# Altium PCB RF-2530.PcbDoc
Units mm, origin at the board's own origin, x right, y up, seen from the top; angles counter-clockwise.
Board outline 32 x 51.63 mm, 2 copper layers (Top Layer, Bottom Layer); 37 components, 37 nets, 135 pads, 49 vias.
Unrouted connection lines stored in the file: 4.
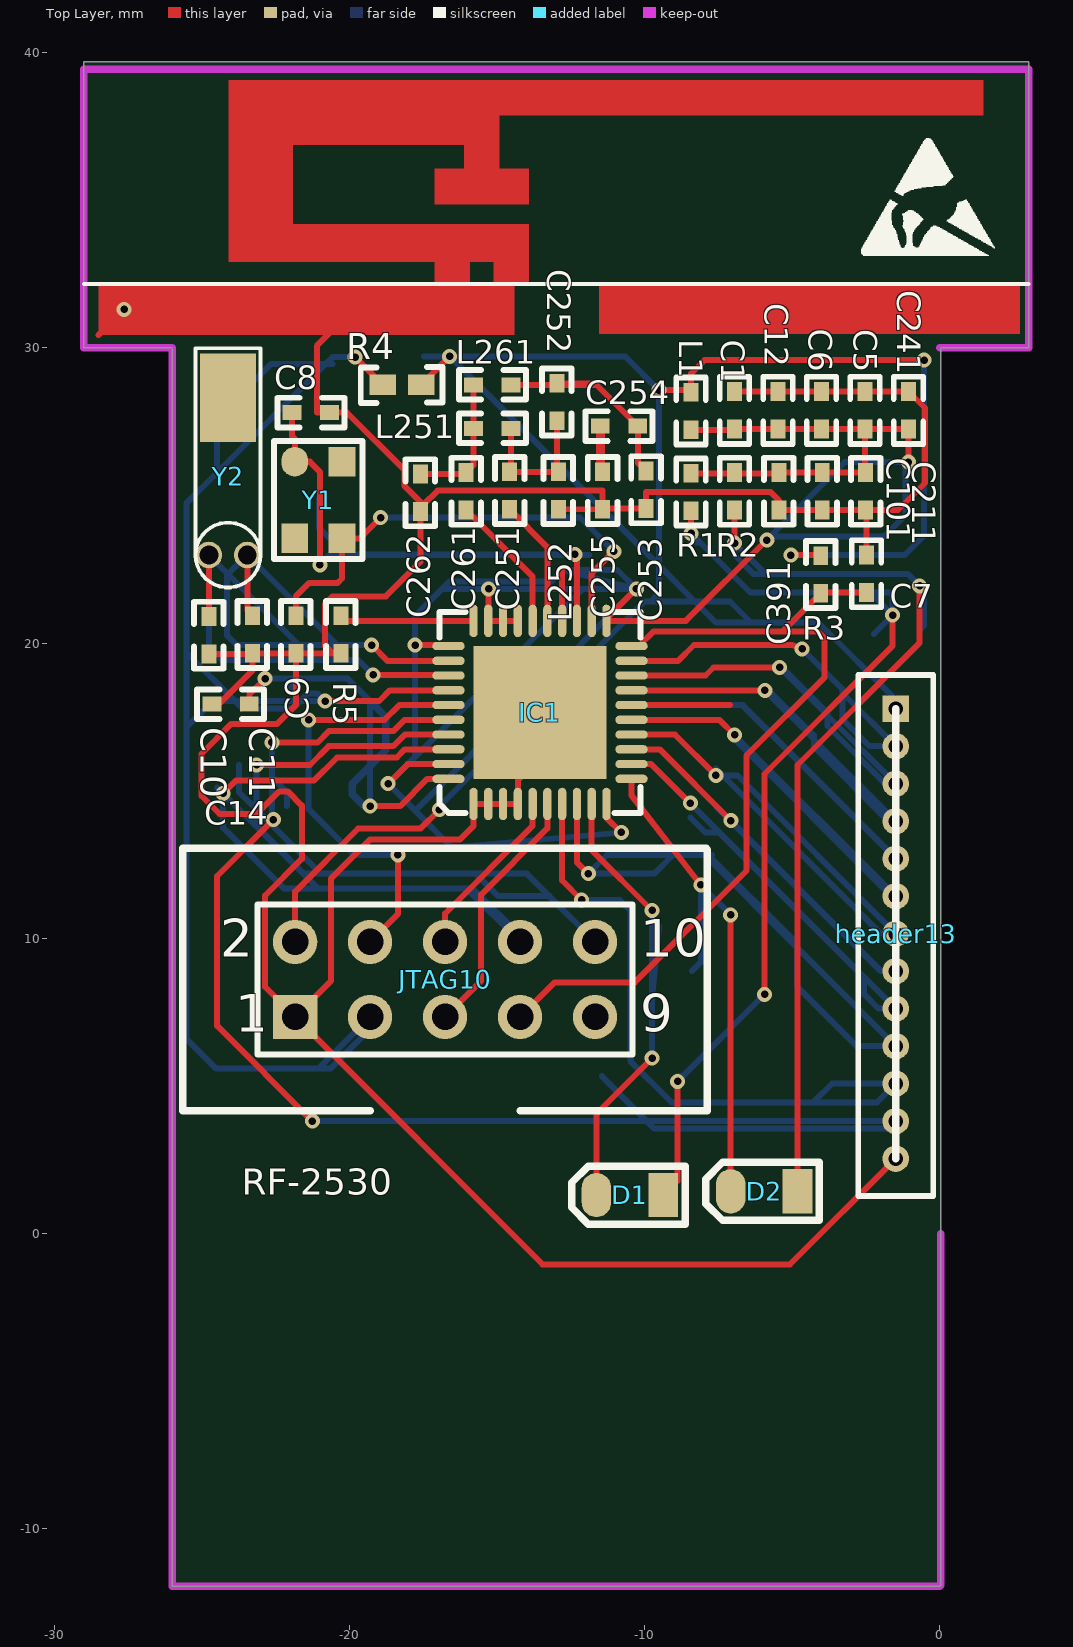
[diagram p0: Top Layer view]
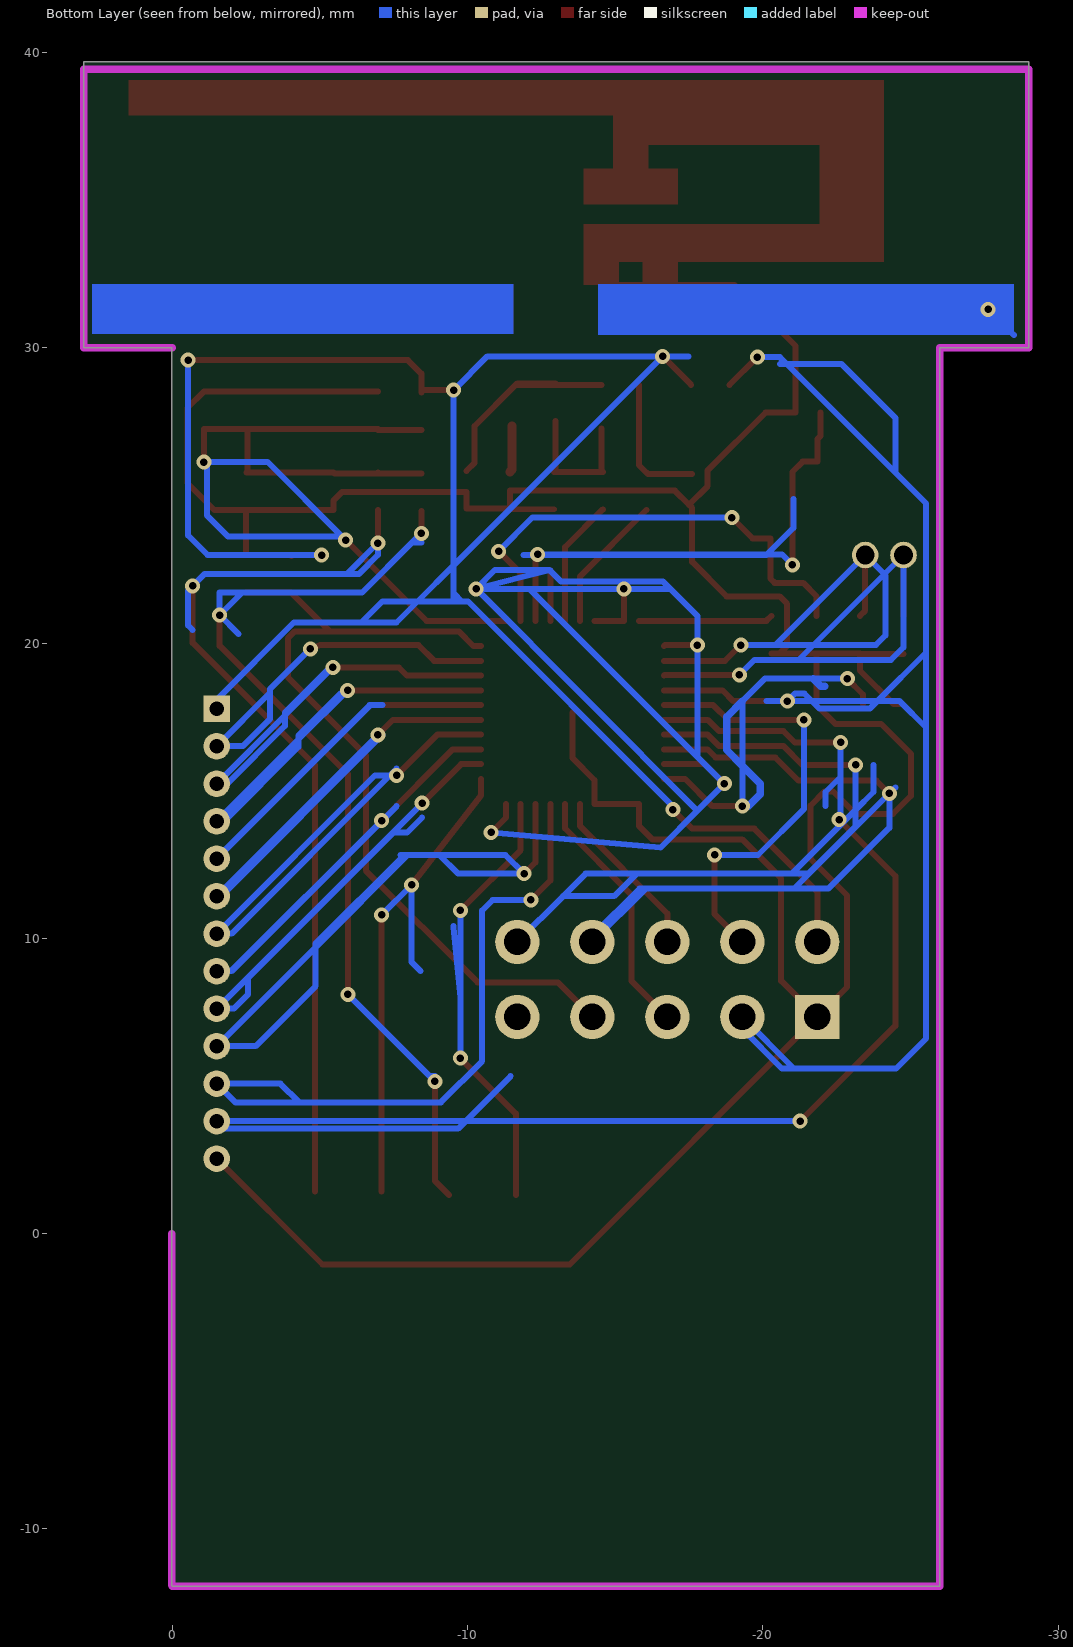
[diagram p1: Bottom Layer view, seen from below]

## Layer stack, top to bottom
Top Layer: signal copper 0.0356
Dielectric: dielectric 0.32, FR-4, Dk 4.8
Bottom Layer: signal copper 0.0356

## Board outline
-29,30 -29,39.692 3,39.692 3,30 0.025,30 0.025,-11.916 0,-11.941 -26,-11.941 -26,30

## Design rules (kind name [scope] priority, off if disabled: settings)
Clearance Clearance_2 [All] p1 off: gap=0.254
Clearance Clearance_1 [All] p2 off: gap=0.4
Clearance [All] p3: gap=0.152
FabricationTestPointUsage TestPointUsage [All] p1: valid=0 allowmultiple=FALSE
FabricationTestpoint Testpoint [All] p1: side=3 testpointundercomponent=TRUE minsize=1.016 maxsize=2.54 preferedsize=1.524 minholesize=0 maxholesize=1.016 preferedholesize=0.813 testpointgrid=0.025 allowsidetop=TRUE allowsidebottom=TRUE usegrid=TRUE gridtolerance=0
PolygonConnect [All] p1: connectstyle=Direct reliefconductorwidth=0.254 reliefentries=4 polygonreliefangle="90 Angle" airgapwidth=0.254
RoutingVias [All] p1: holewidth=0.254 width=0.508 viastyle="Through Hole" minholewidth=0.203 minwidth=0.508 maxholewidth=0.711 maxwidth=1.27
SolderMaskExpansion [All] p1: expansion=0.102
Width [All] p1: maxlimit=2.032 minlimit=0.2 preferedwidth=0.203
26 further rules are at their usual default settings.

## Components (designator, comment, footprint, x,y, rotation, side; value= is the part's Value field where it differs from the comment)
C1 "2.2u" 0402 -6.96,27.254 r90 top
C5 "0.1" 0402 -2.54,27.254 r90 top
C6 "220p" 0402 -4.013,27.254 r90 top
C7 "0.1" 0402 -2.489,21.717 r90 top
C8 "27pF" 0402 -21.946,27.813 r0 top
C9 "27pF" 0402 -21.819,20.93 r270 top
C10 "15pF" 0402 -24.765,20.904 r270 top
C11 "15pF" 0402 -23.292,20.93 r270 top
C12 "0.1" 0402 -5.486,27.254 r90 top
C14 "1uF" 0402 -23.393,17.932 r180 top
C101 "0.1" 0402 -3.988,25.781 r270 top
C211 "0.1" 0402 -2.515,25.781 r270 top
C241 "0.1" 0402 -1.067,27.254 r90 top
C251 "18p" 0402 -14.58,24.536 r90 top
C252 "1p" 0402 -12.979,27.534 r90 top
C253 "" 0402 -9.957,25.832 r270 top
C254 "2.2p" 0402 -10.236,27.356 r180 top
C255 "" 0402 -11.43,24.536 r90 top
C261 "18p" 0402 -16.053,24.511 r90 top
C262 "1p" 0402 -17.602,25.73 r270 top
C391 "1u" 0402 -5.461,25.781 r270 top
D1 "LED" LED-0603 -8.636,2.235 r180 top
D2 "LED" LED-0603 -4.089,2.362 r180 top
header13 "header13" header13 -1.499,17.78 r270 top
IC1 "CC2530" PVQFN-N40 -15.799,14.554 r90 top locked
JTAG10 "DUBUGGER" JTAG -21.844,7.341 r0 top
L1 "2nH" 0402 -8.433,27.229 r90 top
L251 "" 0402 -15.799,27.28 r0 top
L252 "2nH" 0402 -12.929,25.806 r270 top
L261 "2nH" 0402 -15.799,28.753 r0 top
R1 "330R" 0402 -8.433,24.486 r90 top
R2 "330R" 0402 -6.96,24.511 r90 top
R3 "10K" 0402 -4.039,21.692 r90 top
R4 "10K" rea0402 -18.872,28.753 r0 top
R5 "56K" 0402 -20.295,20.93 r270 top
Y1 "32M" XT-SMD3225 -22.555,26.848 r270 top
Y2 "32.768K" XT_3 -24.765,22.987 r0 top

## Footprints (in the part's own frame and the unit in brackets; to place one, negate y for a bottom-side part, rotate by r counter-clockwise, add the part's x,y. Pads: shape width x height; smd on the part's side, far side on the other; paste and mask are expansions set on the pad)
0402 [mil]
  rect 25x20 smd: 1(0,0) 2(50,0)
  silkscreen extent -20,-20 70,20
header13 [mm]
  rect 0.9x0.9 hole 0.5: 1(0,0)
  round 0.9 hole 0.5: 2(1.27,0) 3(2.54,0) 4(3.81,0) 5(5.08,0) 6(6.35,0) 7(7.62,0) 8(8.89,0) 9(10.16,0) 10(11.43,0) 11(12.7,0) 12(13.97,0) 13(15.24,0)
  silkscreen extent -1.14,-1.27 16.51,1.27
JTAG [mm]
  rect 1.5x1.5 hole 0.9: 1(0,0)
  round 1.5 hole 0.9: 2(0,2.54) 3(2.54,0) 4(2.54,2.54) 5(5.08,0) 6(5.08,2.54) 7(7.62,0) 8(7.62,2.54) 9(10.16,0) 10(10.16,2.54)
  silkscreen extent -3.81,-3.18 13.96,5.71
LED-0603 [mm]
  rect 1x1.5 smd: A(0.737,0.93)
  oval 1x1.5 smd: K(3,0.93)
  silkscreen extent 0,-0.05 3.84,1.91
PVQFN-N40 [mm]
  oval 1.1x0.28 smd: 1(0,0) 2(0,-0.5) 3(0,-1) 4(0,-1.5) 5(0,-2) 6(0,-2.5) 7(0,-3) 8(0,-3.5) 9(0,-4) 10(0,-4.5) 21(6.2,-4.5) 22(6.2,-4) 23(6.2,-3.5) 24(6.2,-3) 25(6.2,-2.5) 26(6.2,-2) 27(6.2,-1.5) 28(6.2,-1) 29(6.2,-0.5) 30(6.2,0)
  oval 0.28x1.1 smd: 11(0.85,-5.35) 12(1.35,-5.35) 13(1.85,-5.35) 14(2.35,-5.35) 15(2.85,-5.35) 16(3.35,-5.35) 17(3.85,-5.35) 18(4.35,-5.35) 19(4.85,-5.35) 20(5.35,-5.35) 31(5.35,0.85) 32(4.85,0.85) 33(4.35,0.85) 34(3.85,0.85) 35(3.35,0.85) 36(2.85,0.85) 37(2.35,0.85) 38(1.85,0.85) 39(1.35,0.85) 40(0.85,0.85)
  rect 4.5x4.5 smd: 41(3.1,-2.25)
  silkscreen extent -0.3,-5.65 6.5,1.15
rea0402 [mm]
  rect 0.9x0.7 smd: 1(0,0) 2(1.3,0)
  silkscreen extent -0.75,-0.61 2.02,0.6
XT-SMD3225 [mm]
  oval 1x0.9 smd: 1(0.7,0.7)
  rect 1x0.9 smd: 2(3.3,2.3) 3(3.3,0.7) 4(0.7,2.3)
  silkscreen extent 0,0 4,3
XT_3 [mm]
  round 0.9 hole 0.635: 1(1.3,0) 2(0,0)
  rect 1.9x3 smd: ""(0.65,5.325)
  silkscreen extent -0.45,-1.1 1.75,7

## Part data
C1 C5 C6 C7 C8 C9 C10 C11 C12 C14 C101 C211 C241 C251 C252 C253 C254 C255 C261 C262 C391: library part CAP, "Capacitor"
IC1: library part CC2430
JTAG10: library part JTAG10
L1 L251 L252 L261: library part INDUCTOR
R1 R2 R3 R4 R5: library part RES2
Y1: library part CRY
Y2: library part CRYSTAL, "Crystal"

## Via types
v1: diameter 0.508, hole 0.254, Top Layer to Bottom Layer, 49 vias

## Nets (pads, with @x,y where several pads share a name; then routed paths per layer and width w, separated by ;. In a path a pad name is that pad's centre, name@x,y a point inside that pad or via, vN(x,y) a via of type N, cw(c..) or ccw(c..) an arc to the next point about the centre after c; other vN are vias at no path point)
1VCC1.8: C14.1 IC1.40 | length 16.7
  Top Layer w0.203: C14.1 -23.393,18.263 v1(-22.86,18.796) ; v1(-19.304,14.478) -18.288,14.478 -17.362,15.404 IC1.40
  Bottom Layer w0.203: v1(-22.86,18.796) -21.702,18.796 -20.066,18.796 -19.304,18.034 -19.304,15.85 v1(-19.304,14.478)
  Bottom Layer w0.254: -22.098,18.542 -21.956,18.542 -21.702,18.796 ; v1(-19.304,14.478) -19.507,14.478 -19.914,14.884 -19.914,15.24 -19.304,15.85 -18.771,16.383 -18.771,17.501 -19.304,18.034
CSN: IC1.6 JTAG10.5 | length 8.6
  Top Layer w0.203: JTAG10.5 -15.545,8.56 -15.545,11.481 -13.299,13.727 IC1.6
DC: IC1.34 JTAG10.3 R4.1 | length 72.8
  Top Layer w0.203: v1(-20.828,18.034) -19.003,18.034 -18.633,18.404 IC1.34 ; v1(-19.812,29.693) R4.1
  Bottom Layer w0.203: -20.574,29.464 -20.803,29.464 ; -20.117,18.034 v1(-20.828,18.034) ; v1(-19.812,29.693) -20.574,29.693 -20.803,29.464 ; -25.527,6.604 -24.511,5.588 -21.057,5.588 ; -25.527,6.604 -25.527,17.143 ; -25.527,6.604 -25.527,19.685 ; -25.527,17.143 -24.636,18.034 -23.876,18.034 ; -25.527,17.143 -25.527,19.685 ; -25.527,19.685 -23.876,18.034 ; -25.527,19.685 -25.527,24.74 -24.486,25.781 ; -24.486,25.781 -24.486,27.635 -22.657,29.464 -20.803,29.464 ; -24.486,25.781 -20.803,29.464 ; -23.876,18.034 -23.622,17.78 -21.92,17.78 -21.666,18.034 ; -23.876,18.034 -21.666,18.034 ; -21.666,18.034 -21.412,18.288 -21.082,18.288 v1(-20.828,18.034) ; -21.666,18.034 v1(-20.828,18.034) ; -21.057,5.588 JTAG10.3 -19.304,6.934 -20.65,5.588 -21.057,5.588
DD: IC1.35 JTAG10.4 | length 15
  Top Layer w0.203: v1(-21.387,17.399) -18.821,17.399 -18.316,17.904 IC1.35 ; JTAG10.4 -18.364,10.82 v1(-18.364,12.827)
  Bottom Layer w0.203: v1(-21.387,17.399) -21.387,14.376 -19.837,12.827 v1(-18.364,12.827)
GND: C1.2 C5.2 C6.2 C7.2 C8.2 C9.2 C10.2 C11.2 C12.2 C14.2 C101.2 C211.2 C241.2 C253.2 C255.1 C262.2 C391.2 header13.13 IC1.1 IC1.2 IC1.3 IC1.4 IC1.41 JTAG10.1 L252.2 R5.2 | length 123.8
  Top Layer w0.2: C10.2 -23.317,19.634 C11.2 ; L252.2 C255.1 ; C1.2 C12.2 C6.2 C5.2 C241.2 ; C391.2 C101.2 C211.2 -2.489,24.486 C7.2
  Top Layer w0.203: -28.508,30.437 v1(-27.633,31.312) ; C14.2 -24.432,17.932 -23.292,19.072 C11.2 C9.2 ; R5.2 -20.575,19.66 ; -15.119,32.141 -19.035,32.141 -21.105,30.071 -21.105,27.813 C8.2 -20.092,27.813 -18.133,25.854 -18.133,25.321 C262.2@-17.498,24.686 ; IC1.41 -13.549,16.114 -14.299,15.364 IC1.4 IC1.3 IC1.2 IC1.1 -15.799,13.815 -16.256,13.357 -19.302,13.357 -20.623,12.037 -20.623,8.562 JTAG10.1 ; C391.2 -5.461,24.84 -5.738,25.118 -9.957,25.118 C253.2 -11.405,24.562 C255.1 -11.43,25.168 -17.016,25.168 C262.2@-17.498,24.686 ; C211.2 -1.422,24.511 -0.508,25.425 -0.508,27.965 C241.2 ; header13.13 -5.083,-1.044 -13.459,-1.044 JTAG10.1 ; JTAG10.1 -22.858,8.354 -22.858,11.452 -21.613,12.697 -21.613,14.5 -22.096,14.983 -22.375,14.983 -23.137,14.221 -24.407,14.221 -25.017,14.831 -25.017,16.253 -24.001,17.269 -22.454,17.269 -21.819,17.904 C9.2 ; C9.2 -20.575,19.66 ; -20.575,19.66 -20.826,19.911 -20.826,21.333 -20.572,21.587 -18.771,21.587 -17.602,22.755 C262.2 -17.602,24.582 C262.2@-17.498,24.686
  Bottom Layer w0.203: -28.508,30.437 v1(-27.633,31.312)
LED1: D2.K IC1.11 | length 18.2
  Top Layer w0.203: IC1.11 -10.449,14.843 v1(-8.103,11.811) ; D2.K v1(-7.089,10.798)
  Bottom Layer w0.203: -8.407,8.89 -8.103,9.195 v1(-8.103,11.811) v1(-7.089,10.798)
LED2: D1.K IC1.9 | length 17.3
  Top Layer w0.203: IC1.9 -11.799,12.993 v1(-9.754,10.947) ; D1.K -11.636,4.061 v1(-9.754,5.944)
  Bottom Layer w0.203: v1(-9.754,5.944) -9.754,8.001 ; v1(-9.754,10.947) -9.754,8.001 ; -9.525,10.414 -9.525,10.363 -9.754,8.001
MISO: IC1.37 JTAG10.10 | length 29.7
  Top Layer w0.203: v1(-23.146,15.875) -21.341,15.875 -20.706,16.51 -18.522,16.51 -18.128,16.904 IC1.37
  Bottom Layer w0.203: -23.749,15.875 -23.749,14.961 -23.146,14.358 ; v1(-23.146,15.875) -23.146,14.358 ; JTAG10.10 -13.233,11.43 ; -23.146,14.358 -20.98,12.192 ; -23.146,14.358 -23.146,13.794 -21.544,12.192 -20.98,12.192 ; -20.98,12.192 -15.723,12.192 ; -15.723,12.192 -14.961,11.43 -13.233,11.43 ; -15.723,12.192 -13.995,12.192 -13.233,11.43
MOSI: IC1.38 JTAG10.8 | length 28.6
  Top Layer w0.203: v1(-24.282,14.91) -23.851,15.342 -21.209,15.342 -20.422,16.129 -18.4,16.129 -18.125,16.404 IC1.38
  Bottom Layer w0.203: -24.486,15.113 v1(-24.282,14.91) ; v1(-24.282,14.91) -24.282,13.749 -22.218,11.684 -21.057,11.684 ; v1(-24.282,14.91) -21.057,11.684 ; -21.057,11.684 -16.027,11.684 ; -16.027,11.684 JTAG10.8 -14.224,10.084 -15.824,11.684 -16.027,11.684
NetC1_1: C1.1 C5.1 C6.1 C12.1 C101.1 C211.1 C241.1 C391.1 IC1.10 IC1.21 IC1.24 IC1.27 IC1.28 IC1.29 IC1.31 IC1.39 L1.1 R1.2 R2.2 | length 99.5
  Top Layer w0.203: v1(-18.694,15.24) -18.03,15.904 IC1.39 ; v1(-17.78,19.939) -16.684,19.939 IC1.31 ; v1(-15.291,21.844) -15.291,20.762 IC1.29 IC1.28 IC1.27 ; IC1.24 -12.799,22.456 ; IC1.10 -11.299,14.093 v1(-10.795,13.589) ; v1(-10.287,21.844) -11.299,20.832 IC1.21 -8.608,20.754 v1(-5.867,23.495) ; R1.2 -6.985,25.756 R2.2 -6.934,25.756 -5.486,25.756 C391.1 C101.1 C211.1 -2.54,25.806 C5.1 ; L1.1 -6.96,27.229 C1.1 C12.1 C6.1 C5.1 ; v1(-1.067,26.137) C241.1 C5.1
  Bottom Layer w0.203: v1(-10.795,13.589) -16.535,13.081 -17.78,14.326 ; v1(-5.867,23.495) v1@-5.74,23.622 ; v1@-1.168,26.035 -1.168,24.333 -1.88,23.622 v1@-5.74,23.622 ; v1(-1.067,26.137) -3.226,26.137 v1@-5.74,23.622 ; -17.78,14.326 v1(-10.287,21.844) ; -17.78,14.326 v1(-18.694,15.24) -17.78,16.154 ; -17.78,16.154 -12.09,21.844 ; -17.78,16.154 v1(-17.78,19.939) -17.78,20.93 -16.866,21.844 ; -16.866,21.844 -16.612,22.098 ; -16.866,21.844 v1(-15.291,21.844) -12.09,21.844 ; -16.612,22.098 -13.157,22.098 ; -16.612,22.098 -15.291,22.098 -13.157,22.098 ; -13.157,22.098 -12.799,22.456 -12.776,22.479 ; -12.776,22.479 v1(-10.287,21.844) ; -12.776,22.479 -10.922,22.479 v1(-10.287,21.844) ; -12.09,21.844 v1(-10.287,21.844)
NetC8_1: C8.1 IC1.23 Y1.1 | length 27.4
  Top Layer w0.203: C8.1 -21.946,27.011 -21.855,26.921 Y1.1 -21.348,26.148 -21.004,25.803 v1(-21.004,22.654) ; v1(-12.368,23.009) -12.299,22.941 IC1.23
  Bottom Layer w0.203: -21.031,24.892 -21.031,23.901 -20.139,23.009 ; v1(-21.004,22.654) -20.648,23.009 -20.139,23.009 ; v1(-12.368,23.009) -20.139,23.009 ; -11.887,22.987 -20.117,22.987 -20.139,23.009
NetC9_1: C9.1 IC1.22 Y1.2 | length 16.5
  Top Layer w0.203: C9.1 -21.819,21.59 -21.364,22.045 -20.402,22.045 -20.255,22.192 Y1.2 -19.658,23.548 v1(-18.948,24.257) ; IC1.22 -11.799,22.364 v1(-11.049,23.114)
  Bottom Layer w0.203: v1(-18.948,24.257) -12.192,24.257 v1(-11.049,23.114)
NetC10_1: C10.1 IC1.33 Y2.2 | length 18.7
  Top Layer w0.203: C10.1 Y2.2 ; v1(-19.202,18.923) -16.668,18.923 IC1.33
  Bottom Layer w0.203: v1(-19.202,18.923) -19.71,19.431 -21.209,19.431 ; -21.209,19.431 Y2.2 -24.765,19.863 -24.333,19.431 -21.209,19.431
NetC11_1: C11.1 IC1.32 Y2.1 | length 17.4
  Top Layer w0.203: Y2.1 -23.465,21.103 C11.1 ; v1(-19.253,19.939) -18.718,19.404 IC1.32
  Bottom Layer w0.203: Y2.1@-23.495,22.987 Y2.1 ; Y2.1@-23.465,22.915 Y2.1 ; v1(-19.253,19.939) -20.417,19.939 ; Y2.1 -24.155,22.297 -24.155,20.269 -23.825,19.939 -20.417,19.939 ; Y2.1 -20.417,19.939
NetC251_1: C251.1 IC1.25 | length 4.3
  Top Layer w0.203: C251.1 -13.299,23.256 IC1.25
NetC251_2: C251.2 C252.1 L251.2 L252.1 | length 4.9
  Top Layer w0.203: C251.2 C251.2@-14.478,25.806 ; L251.2 -14.529,25.857 C251.2@-14.478,25.806 ; C252.1 -12.979,25.857 L252.1 -13.765,25.806 C251.2@-14.478,25.806
NetC252_2: C252.2 C253.1 C254.1 L261.2 | length 7.9
  Top Layer w0.203: L261.2 -11.633,28.753 ; C252.2 -11.684,28.804 -11.633,28.753 ; C253.1 -10.236,26.111 C254.1 -11.633,28.753
NetC254_2: C254.2 C255.2 | length 1.6
  Top Layer w0.305: C254.2 -11.506,25.883 C255.2
NetC261_1: C261.1 IC1.26 | length 4.7
  Top Layer w0.203: C261.1 -13.799,22.257 IC1.26
NetC261_2: C261.2 C262.1 L251.1 L261.1 | length 4.6
  Top Layer w0.203: C262.1 -16.104,25.73 C261.2 -15.799,26.035 L251.1 L261.1
NetD1_A: D1.A R1.1 | length 36.7
  Top Layer w0.203: D1.A -8.89,1.788 v1(-8.89,5.156) ; v1(-8.433,23.724) R1.1 ; v1(-5.944,8.103) -5.944,15.57 -1.6,19.914 v1(-1.6,20.955)
  Bottom Layer w0.203: v1(-8.89,5.156) v1@-8.712,5.334 ; v1@-8.89,5.334 v1@-8.712,5.334 ; -8.433,23.419 -8.128,23.419 ; v1(-8.433,23.724) -8.128,23.419 ; -7.188,6.858 v1@-8.712,5.334 ; v1(-5.944,8.103) v1@-8.712,5.334 ; -2.235,20.32 v1(-1.6,20.955) ; -8.128,23.419 -6.426,21.717 -2.362,21.717 ; -2.362,21.717 v1(-1.6,20.955) ; -2.362,21.717 -1.6,21.717 v1(-1.6,20.955)
NetD2_A: D2.A R2.1 | length 33.6
  Top Layer w0.203: v1(-6.96,23.393) R2.1 ; D2.A -4.826,15.875 -0.686,20.015 v1(-0.686,21.946)
  Bottom Layer w0.203: -0.686,20.447 -0.533,20.599 -0.533,21.793 v1(-0.686,21.946) -1.092,22.352 -5.918,22.352 ; -5.918,22.352 v1(-6.96,23.393) -6.96,22.987 -6.325,22.352 -5.918,22.352
NetIC1_30: IC1.30 R5.1 | length 4.6
  Top Layer w0.203: R5.1 -20.119,20.754 IC1.30
P00: header13.2 IC1.19 | length 13.7
  Top Layer w0.203: IC1.19 -8.866,19.404 -8.331,19.939 -5.004,19.939 v1(-4.674,19.812)
  Bottom Layer w0.203: v1(-4.674,19.812) -3.302,18.44 -3.302,18.313 ; -3.302,18.313 header13.2 -2.388,16.51 -3.302,17.424 -3.302,18.313
P01: header13.3 IC1.18 | length 16.4
  Top Layer w0.203: IC1.18 -7.944,18.904 -7.671,19.177 v1(-5.436,19.177)
  Bottom Layer w0.203: v1(-5.436,19.177) -3.81,17.551 ; v1@-5.334,19.177 -3.81,17.653 -3.81,17.551 ; -3.81,17.551 header13.3 -1.854,15.24 -3.81,17.196 -3.81,17.551
P1.2: header13.10 IC1.8 | length 30.3
  Top Layer w0.203: IC1.8 -12.299,12.578 v1(-11.913,12.192)
  Bottom Layer w0.203: -7.722,12.827 -7.849,12.827 ; -9.042,12.827 -9.677,12.192 v1(-11.913,12.192) -11.278,12.827 -9.042,12.827 ; -9.042,12.827 -7.976,12.827 ; -9.042,12.827 -7.849,12.827 ; -7.976,12.827 -4.851,9.703 ; -7.976,12.827 -7.849,12.827 ; -7.849,12.827 -4.851,9.83 -4.851,9.703 ; -4.851,9.703 header13.10 -2.819,6.35 -4.851,8.382 -4.851,9.703
P1.3: header13.11 IC1.7 | length 23.3
  Top Layer w0.203: IC1.7 -12.799,11.961 v1(-12.141,11.303)
  Bottom Layer w0.203: v1(-12.141,11.303) -10.846,11.303 -10.49,10.947 -10.49,5.842 -9.093,4.445 -4.293,4.445 ; -4.293,4.445 -3.658,5.08 header13.11 -2.134,4.445 -4.293,4.445
P02: header13.4 IC1.17 | length 17
  Top Layer w0.203: IC1.17 v1(-5.933,18.404)
  Bottom Layer w0.203: v1(-5.933,18.404) -4.267,16.739 ; -5.69,18.288 -4.267,16.866 -4.267,16.739 ; -4.267,16.739 header13.4 -1.753,13.97 -4.267,16.485 -4.267,16.739
P03: header13.5 IC1.16 | length 18.9
  Top Layer w0.203: IC1.16 -7.115,17.904
  Bottom Layer w0.203: -6.703,17.904 header13.5 -1.499,12.725 -6.677,17.904 ; -6.703,17.904 -7.115,17.904 -6.677,17.904 ; -6.703,17.904 -6.677,17.904
P04: header13.6 IC1.15 | length 19.1
  Top Layer w0.203: IC1.15 -7.473,17.404 v1(-6.96,16.891)
  Bottom Layer w0.203: v1@-7.112,16.891 header13.6@-1.651,11.43 ; v1(-6.96,16.891) header13.6
P05: header13.7 IC1.14 | length 20.2
  Top Layer w0.203: IC1.14 -8.977,16.904 v1(-7.595,15.522)
  Bottom Layer w0.203: v1(-7.595,15.522) v1@-7.368,15.522 ; v1@-7.595,15.748 v1@-7.368,15.522 ; v1@-7.368,15.522 -2.007,10.16 header13.7 -6.86,15.522 v1@-7.368,15.522
P06: header13.8 IC1.13 | length 20
  Top Layer w0.203: IC1.13 -9.495,16.404 v1(-7.084,13.993)
  Bottom Layer w0.203: -7.595,14.478 -2.007,8.89 ; v1(-7.084,13.993) -1.981,8.89 header13.8
P07: header13.9 IC1.12 | length 22.4
  Top Layer w0.203: IC1.12 -9.783,15.904 v1(-8.458,14.58)
  Bottom Layer w0.203: -8.458,14.097 -7.95,13.589 -7.493,13.589 -2.565,8.661 -2.565,8.103 -2.083,7.62 header13.9 v1(-8.458,14.58)
P20: header13.12 IC1.36 | length 53
  Top Layer w0.203: v1(-22.631,16.637) -21.082,16.637 -20.701,17.018 -18.517,17.018 -18.13,17.404 IC1.36 ; v1(-22.581,14.021) -24.486,12.116 -24.486,7.036 v1(-21.26,3.81)
  Bottom Layer w0.203: v1(-22.631,16.637) -22.631,15.469 ; v1(-22.581,14.021) -22.631,14.072 -22.631,15.469 ; -22.123,14.478 -22.123,14.961 -22.631,15.469 ; v1(-21.26,3.81) -9.931,3.81 ; -11.455,5.334 -9.931,3.81 ; -9.931,3.81 -9.677,3.556 -1.753,3.556 header13.12 -9.931,3.81
RESET_N: C7.1 IC1.20 JTAG10.7 R3.1 | length 28.9
  Top Layer w0.203: JTAG10.7 -13.056,8.509 -10.338,8.509 -6.553,12.294 -6.553,16.202 -3.909,18.846 -3.909,20.162 -4.146,20.399 -5.332,20.399 ; IC1.20 -10.195,19.904 -9.7,20.399 -5.332,20.399 ; C7.1 -2.489,21.714 -4.039,21.714 R3.1 -5.332,20.399
SCK: IC1.5 JTAG10.6 | length 5.9
  Top Layer w0.203: JTAG10.6 -16.764,10.846 -13.799,13.811 IC1.5
VDD_3.3V: header13.1 JTAG10.2 L1.2 R3.2 R4.2 | length 83.6
  Top Layer w0.203: JTAG10.2 -21.844,11.585 -19.713,13.716 -17.602,13.716 v1(-16.954,14.365) ; R4.2 v1(-16.607,29.718) ; v1(-9.525,28.575) L1.2@-8.433,28.575 ; L1.2 L1.2@-8.433,28.575 ; v1(-5.055,22.987) -4.064,22.987 R3.2 ; v1(-0.533,29.591) -7.976,29.591 -8.433,29.134 L1.2@-8.433,28.575
  Bottom Layer w0.203: -17.475,29.718 v1(-16.607,29.718) ; v1(-16.954,14.365) -16.954,14.478 -10.019,21.412 ; v1(-5.055,22.987) -1.194,22.987 -0.533,23.647 v1(-0.533,29.591) ; header13.1 -1.499,18.085 -4.115,20.701 -6.401,20.701 ; v1(-16.607,29.718) -10.668,29.718 v1(-9.525,28.575) -9.525,22.636 ; v1(-16.607,29.718) -9.525,22.636 ; -10.019,21.412 -9.802,21.412 ; -10.019,21.412 -9.525,21.412 ; -9.802,21.412 -9.525,21.689 ; -9.802,21.412 -9.525,21.412 ; -9.525,21.412 -8.301,21.412 ; -9.525,21.412 -9.525,21.689 ; -9.525,21.412 -7.112,21.412 ; -9.525,21.689 -9.525,22.636 ; -9.525,22.636 -8.301,21.412 ; -8.301,21.412 -7.59,20.701 -6.401,20.701 ; -8.301,21.412 -7.112,21.412 ; -7.112,21.412 -6.401,20.701
pads on no net: JTAG10.9 Y1.3 Y1.4 Y2.

## Polygon pours and split planes (outlines as drawn)
GND on Top Layer "GND" (solid, remove dead copper, pour order 1000): 36.494,28.16 50.21,28.16 50.21,26.636 47.314,26.636 47.314,-3.463 21.61,-3.463 21.61,26.636 18.739,26.636 18.739,28.262 18.714,28.287 32.633,28.287 32.633,23.614 32.608,23.588 36.494,23.588
GND on Bottom Layer "GND" (hatched 90Degree grid 0 track 0.2, remove dead copper, pour order 1001): -64.491,48.133 -50.775,48.133 -50.775,46.609 -53.67,46.609 -53.67,16.51 -79.375,16.51 -79.375,46.609 -82.245,46.609 -82.245,48.235 -82.271,48.26 -68.351,48.26 -68.351,43.586 -68.377,43.561 -64.491,43.561

## Keep-outs
Keep-Out Layer:
  lines w0.254: 0,-11.941 -6.5,-11.941 -19.5,-11.941 -26,-11.941 -26,30 -29,30 -29,39.435 3,39.435 3,30 0,30 ; 0.025,-11.916 0.025,0

## Other copper
Top Layer:
  region net GND: 2.718,32.172 -11.557,32.172 -11.557,30.48 2.718,30.48
  rectangle net GND: -28.508,30.437 -14.41,32.172
  rectangle net GND: -17.119,32.141 -15.919,32.941
  rectangle net GND: -24.099,34.202 -21.919,39.082
  rectangle net GND: -21.919,36.872 -16.119,39.082
  rectangle net GND: -16.119,36.072 -14.919,39.082
  rectangle net GND: -15.119,32.141 -13.919,32.941
  rectangle net GND: -24.099,32.912 -13.919,34.202
  rectangle net GND: -17.119,34.862 -13.919,36.072
  rectangle net GND: -14.919,37.872 1.481,39.082
Bottom Layer:
  rectangle net GND: -28.508,30.437 -14.41,32.172
  region net GND: 2.718,32.172 -11.557,32.172 -11.557,30.48 2.718,30.48

## Silkscreen, mask and mechanical layers (free items; w line width, h text height)
Top Overlay:
  drawing of 298 lines, arcs and shapes, not listed
  text "RF-2530" at -23.647,1.016 h1.52
Mechanical 1:
  lines w0.254: -29,30 -29,39.692 3,39.692 3,30 0.025,30 0.025,0 ; -26,0 -26,30

## Text inside footprints (layer, text, board x,y; h text height)
JTAG10: Top Overlay "2" at -24.384,9.373 h1.27; Top Overlay "1" at -23.876,6.833 h1.27; Top Overlay "9" at -10.16,6.833 h1.27; Top Overlay "10" at -10.16,9.373 h1.27